# Altium PCB CH32V205V-R0.PcbDoc (part 3 of 3)
Units mm, origin at the board's own origin, x right, y up, seen from the top; angles counter-clockwise.
Board outline 98 x 92 mm, 2 copper layers (Top Layer, Bottom Layer); 69 components, 110 nets, 401 pads, 975 vias.
Unrouted connection lines stored in the file: 82.
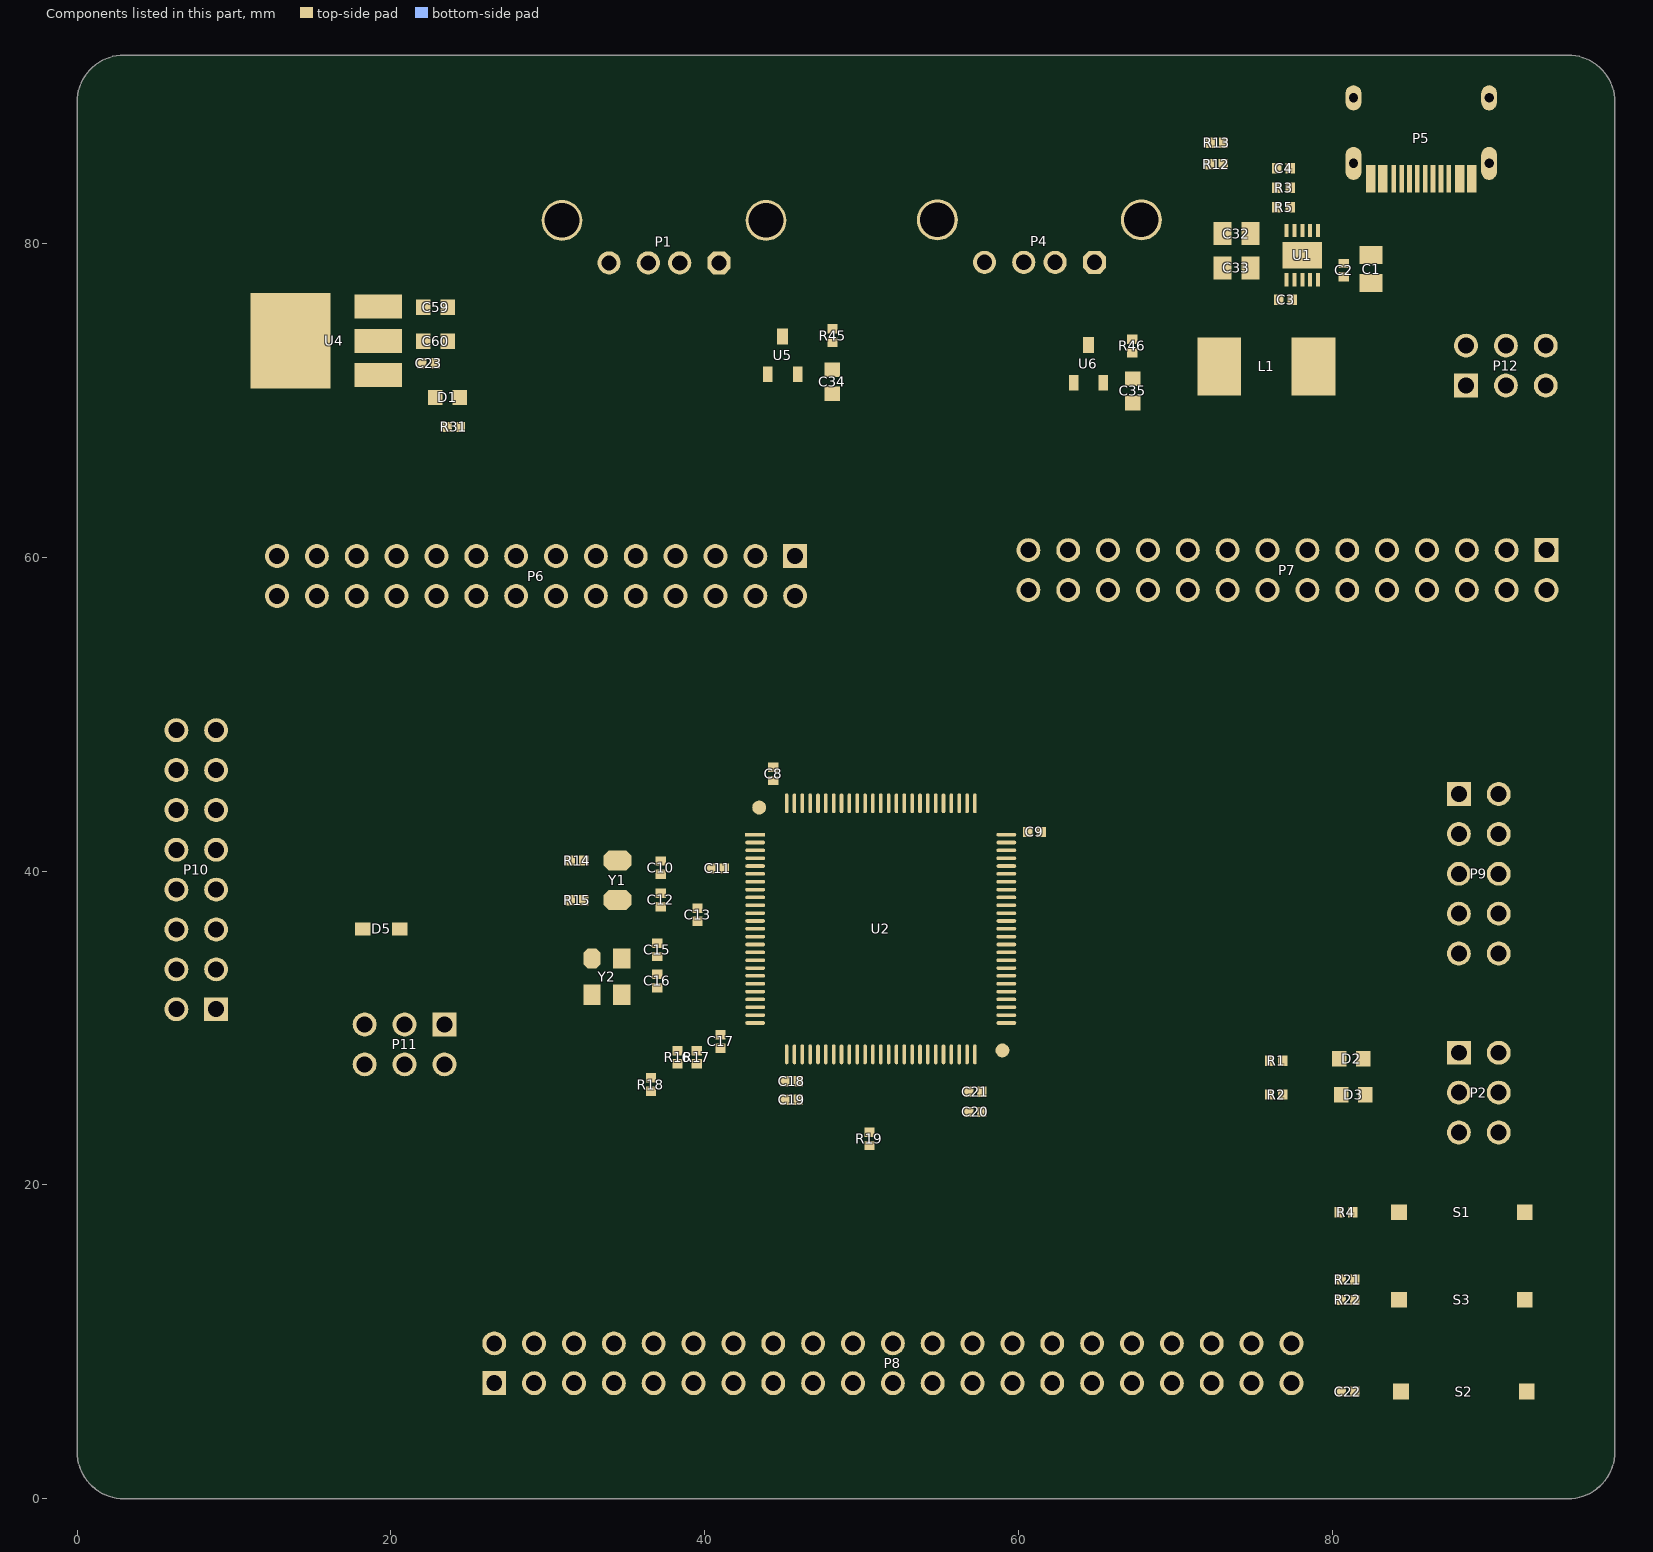
[diagram p3: the components of this part, seen from the top]

## Silkscreen, mask and mechanical layers (free items; w line width, h text height)
Top Overlay:
  lines w0.254: 88.654,68.563 88.654,69.333 ; 91.121,68.563 91.121,69.333
  text "GND" at 93.19,77.438 h0.89 r270
  text "5V" at 87.959,76.74 h0.89 r270
  text "5V" at 90.626,76.74 h0.89 r270
  text "GND" at 93.19,69.31 h0.89 r270
  text "VBUS_CC" at 86.453,67.373 h0.89
  text "PA12" at 60.237,65.434 h0.89 r270
  text "PC12" at 77.977,65.434 h0.89 r270
  text "PC10" at 80.512,65.434 h0.89 r270
  text "PA14" at 83.046,65.434 h0.89 r270
  text "PA10" at 85.58,65.434 h0.89 r270
  text "PC15" at 24.959,64.745 h0.89 r270
  text "PC13" at 27.499,64.745 h0.89 r270
  text "PB9" at 62.772,64.694 h0.89 r270
  text "PB4" at 65.306,64.694 h0.89 r270
  text "PD7" at 67.84,64.694 h0.89 r270
  text "PD5" at 70.374,64.694 h0.89 r270
  text "PD3" at 72.909,64.694 h0.89 r270
  text "PA8" at 88.115,64.694 h0.89 r270
  text "PC8" at 90.649,64.694 h0.89 r270
  text "PC6" at 93.183,64.694 h0.89 r270
  text "PD1" at 75.443,64.398 h0.89 r270
  text "GND" at 12.386,64.004 h0.89 r270
  text "GND" at 14.799,64.004 h0.89 r270
  text "PC3" at 19.879,64.004 h0.89 r270
  text "PE5" at 30.166,64.004 h0.89 r270
  text "PE3" at 32.579,64.004 h0.89 r270
  text "PB8" at 37.532,64.004 h0.89 r270
  text "GND" at 40.199,64.004 h0.89 r270
  text "VIO" at 42.612,63.856 h0.89 r270
  text "VIO" at 45.38,63.856 h0.89 r270
  text "PA1" at 17.466,63.708 h0.89 r270
  text "PC1" at 22.546,63.708 h0.89 r270
  text "PE1" at 35.246,63.708 h0.89 r270
  text "PA11" at 60.237,56.134 h0.89 r270
  text "PB5" at 62.772,56.134 h0.89 r270
  text "PB3" at 65.306,56.134 h0.89 r270
  text "PD6" at 67.84,56.134 h0.89 r270
  text "PD4" at 70.374,56.134 h0.89 r270
  text "PD2" at 72.909,56.134 h0.89 r270
  text "PD0" at 75.443,56.134 h0.89 r270
  text "PC11" at 77.977,56.134 h0.89 r270
  text "PA15" at 80.512,56.134 h0.89 r270
  text "PA13" at 83.046,56.134 h0.89 r270
  text "PA9" at 85.58,56.134 h0.89 r270
  text "GND" at 88.115,56.134 h0.89 r270
  text "PC9" at 90.649,56.134 h0.89 r270
  text "PC7" at 93.183,56.134 h0.89 r270
  text "GND" at 12.386,55.733 h0.89 r270
  text "GND" at 14.924,55.733 h0.89 r270
  text "PA0" at 17.462,55.733 h0.89 r270
  text "PC2" at 20,55.733 h0.89 r270
  text "PC0" at 22.538,55.733 h0.89 r270
  text "PC14" at 25.076,55.733 h0.89 r270
  text "PE6" at 27.614,55.733 h0.89 r270
  text "PE4" at 30.152,55.733 h0.89 r270
  text "PE2" at 32.69,55.733 h0.89 r270
  text "PE0" at 35.228,55.733 h0.89 r270
  text "PB6" at 37.766,55.733 h0.89 r270
  text "PB7" at 40.304,55.733 h0.89 r270
  text "VDD" at 42.842,55.733 h0.89 r270
  text "VDD" at 45.38,55.733 h0.89 r270
  text "3V3" at 2.161,48.622 h0.89
  text "GND" at 10.644,48.622 h0.89
  text "GND" at 10.644,46.064 h0.89
  text "3V3" at 2.161,46.061 h0.89
  text "SWCK" at 82.845,44.507 h0.89
  text "TXD" at 92.472,44.507 h0.89
  text "3V3" at 2.161,43.499 h0.89
  text "GND" at 10.644,43.505 h0.89
  text "SWIO" at 82.994,41.941 h0.89
  text "RXD" at 92.472,41.941 h0.89
  text "GND" at 2.161,40.938 h0.89
  text "GND" at 10.644,40.947 h0.89
  text "GND" at 83.734,39.376 h0.89
  text "GND" at 92.472,39.376 h0.89
  text "GND" at 2.161,38.377 h0.89
  text "GND" at 10.644,38.389 h0.89
  text "VDD" at 83.734,36.811 h0.89
  text "VDD" at 92.472,36.811 h0.89
  text "GND" at 10.644,35.831 h0.89
  text "5V" at 2.795,35.816 h0.89
  text "VBAT" at 20.387,35.027 h0.89 r270
  text "VDD" at 17.974,34.265 h0.89 r270
  text "5V" at 84.623,34.245 h0.89
  text "5V" at 92.472,34.245 h0.89
  text "VIO" at 23.054,34.138 h0.89 r270
  text "5V" at 2.795,33.441 h0.89
  text "GND" at 10.644,33.273 h0.89
  text "VBUS" at 1.399,31.096 h0.89
  text "GND" at 10.644,30.715 h0.89
  text "_CC" at 1.653,29.593 h0.89
  text "GND" at 92.523,28.194 h0.89
  text "LED1" at 83.506,27.94 h0.89
  text "3V3" at 17.72,25.756 h0.89 r270
  text "3V3" at 20.387,25.756 h0.89 r270
  text "3V3" at 23.054,25.756 h0.89 r270
  text "LED2" at 83.252,25.527 h0.89
  text "GND" at 92.523,25.464 h0.89
  text "KEY" at 83.887,22.86 h0.89
  text "GND" at 92.523,22.733 h0.89
  text "BOOT1" at 28.769,15.32 h0.89 r270
  text "KEY" at 87.189,15.113 h0.89
  text "PE13" at 51.502,14.58 h0.89 r270
  text "PE15" at 54.169,14.58 h0.89 r270
  text "PB13" at 59.249,14.58 h0.89 r270
  text "PB15" at 61.789,14.58 h0.89 r270
  text "PD13" at 69.282,14.58 h0.89 r270
  text "PD15" at 72.076,14.58 h0.89 r270
  text "PB11" at 56.709,14.283 h0.89 r270
  text "PD11" at 66.742,14.283 h0.89 r270
  text "PE11" at 49.089,14.199 h0.89 r270
  text "GND" at 76.927,13.966 h0.89 r270
  text "GND" at 26.102,13.839 h0.89 r270
  text "PA3" at 31.309,13.839 h0.89 r270
  text "PA5" at 33.849,13.839 h0.89 r270
  text "PC5" at 38.802,13.839 h0.89 r270
  text "PE9" at 46.422,13.839 h0.89 r270
  text "PD9" at 64.202,13.839 h0.89 r270
  text "GND" at 74.362,13.839 h0.89 r270
  text "PA7" at 36.262,13.818 h0.89 r270
  text "PE7" at 43.882,13.818 h0.89 r270
  text "PB1" at 41.342,13.543 h0.89 r270
  text "Download" at 85.03,9.525 h0.89
  text "GND" at 26.102,5.69 h0.89 r270
  text "BOOT0" at 28.655,5.69 h0.89 r270
  text "PA2" at 31.207,5.69 h0.89 r270
  text "PA4" at 33.76,5.69 h0.89 r270
  text "PA6" at 36.313,5.69 h0.89 r270
  text "PC4" at 38.865,5.69 h0.89 r270
  text "PB0" at 41.418,5.69 h0.89 r270
  text "PB2" at 43.971,5.69 h0.89 r270
  text "PE8" at 46.523,5.69 h0.89 r270
  text "PE10" at 49.076,5.69 h0.89 r270
  text "PE12" at 51.629,5.69 h0.89 r270
  text "PE14" at 54.182,5.69 h0.89 r270
  text "PB10" at 56.734,5.69 h0.89 r270
  text "PB12" at 59.287,5.69 h0.89 r270
  text "PB14" at 61.84,5.69 h0.89 r270
  text "PD8" at 64.392,5.69 h0.89 r270
  text "PD10" at 66.945,5.69 h0.89 r270
  text "PD12" at 69.498,5.69 h0.89 r270
  text "PD14" at 72.05,5.69 h0.89 r270
  text "GND" at 74.603,5.69 h0.89 r270
  text "GND" at 77.156,5.69 h0.89 r270
  text "CH32V205V-R0-1v5" at 2.531,4.394 h1.14
  text "RST" at 87.316,3.556 h0.89
Mechanical 1:
  the board outline again, w0.254

## Text inside footprints (layer, text, board x,y; h text height)
D1: Top Overlay "+" at 21.868,69.902 h1.02 r90
D2: Top Overlay "+" at 79.465,27.763 h1.02 r90
D3: Top Overlay "+" at 79.592,25.477 h1.02 r90
P1: Top Overlay "D-" at 39.379,81.807 h1.02 r180; Top Overlay "D+" at 37.093,81.807 h1.02 r180; Top Overlay "V" at 41.411,81.807 h1.02 r180; Top Overlay "G" at 34.299,81.807 h1.02 r180
P4: Top Overlay "D+" at 61.016,81.84 h1.02 r180; Top Overlay "D-" at 63.16,81.84 h1.02 r180; Top Overlay "V" at 65.334,81.84 h1.02 r180; Top Overlay "G" at 58.222,81.84 h1.02 r180